# EAGLE board rev_k v57 (EAGLE 9.7.0), part 1 of 2
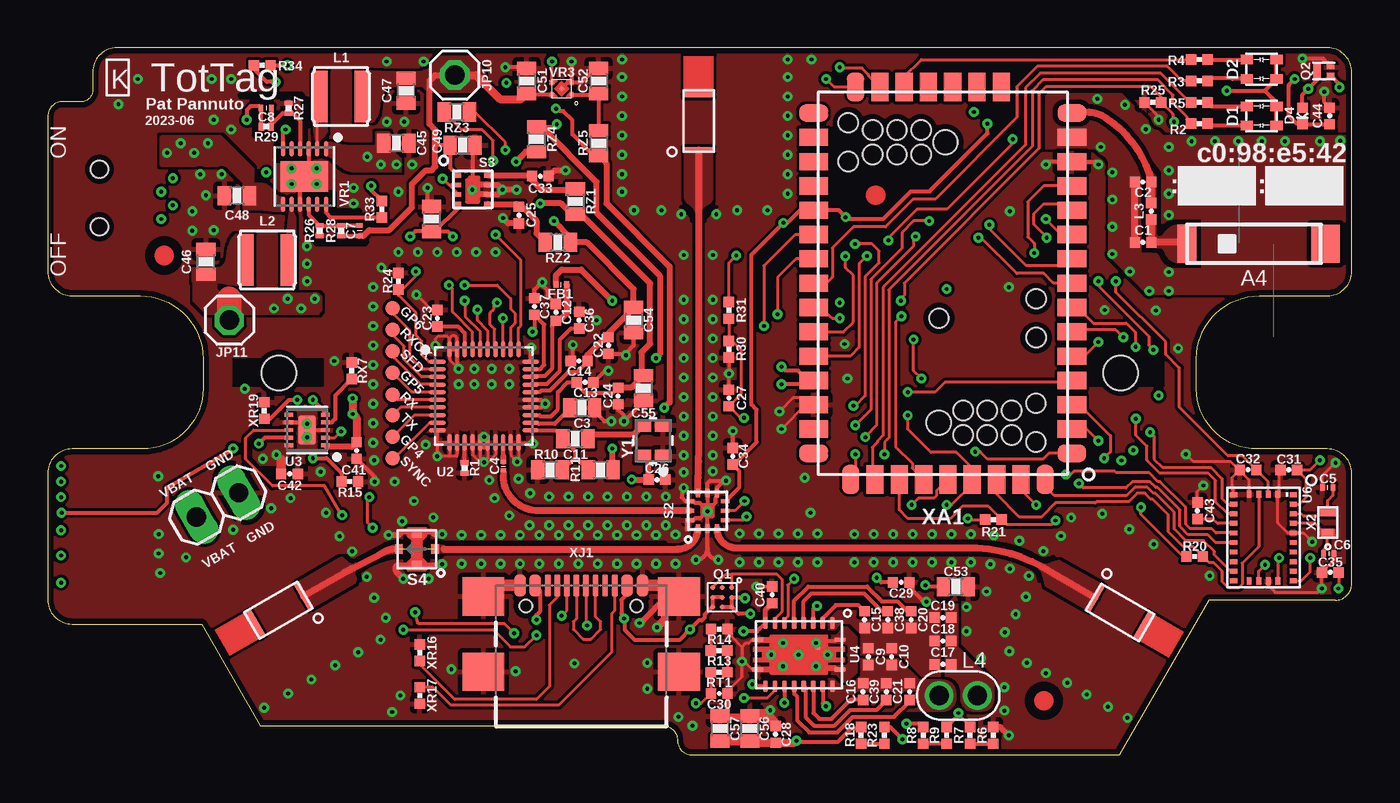
[diagram p0: board, top side]
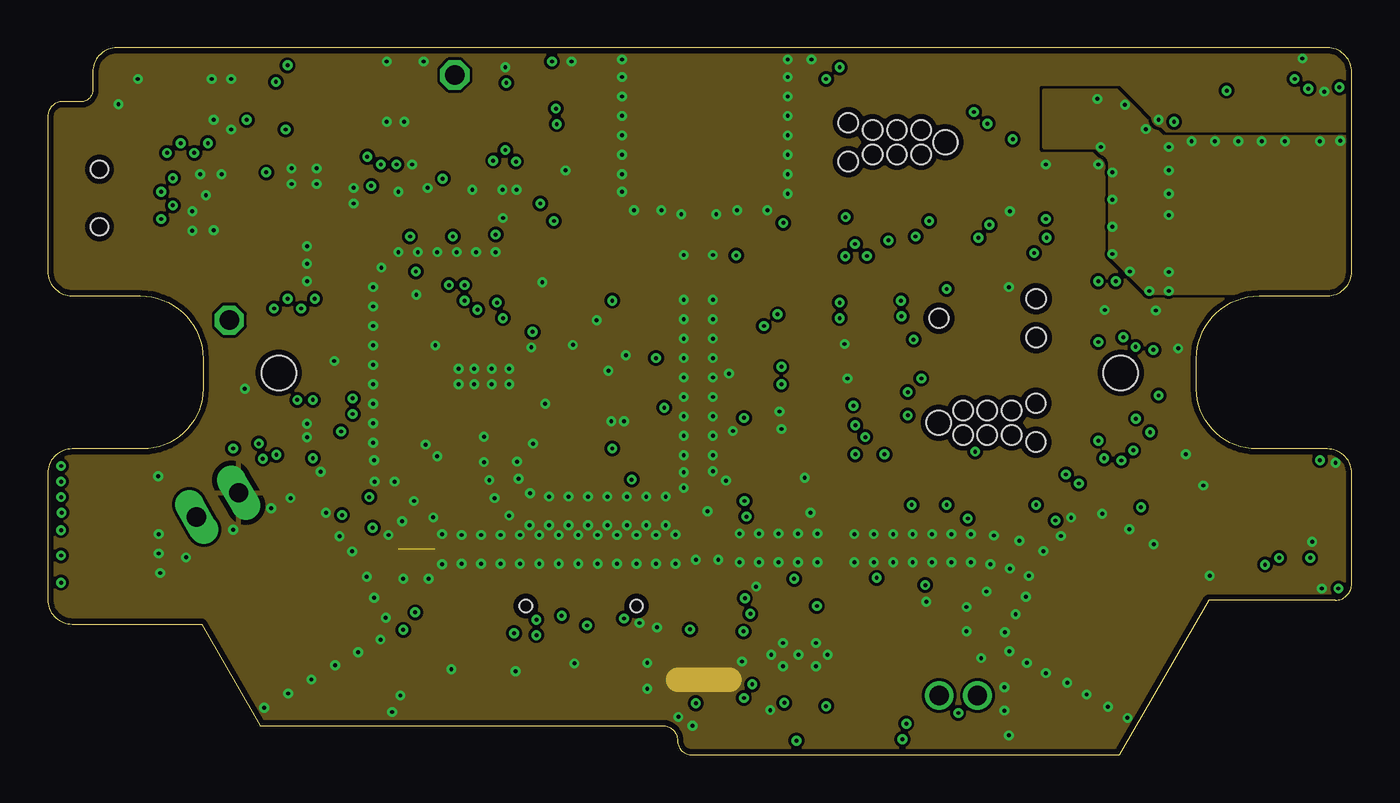
[diagram p1: board, inner layer Route2]
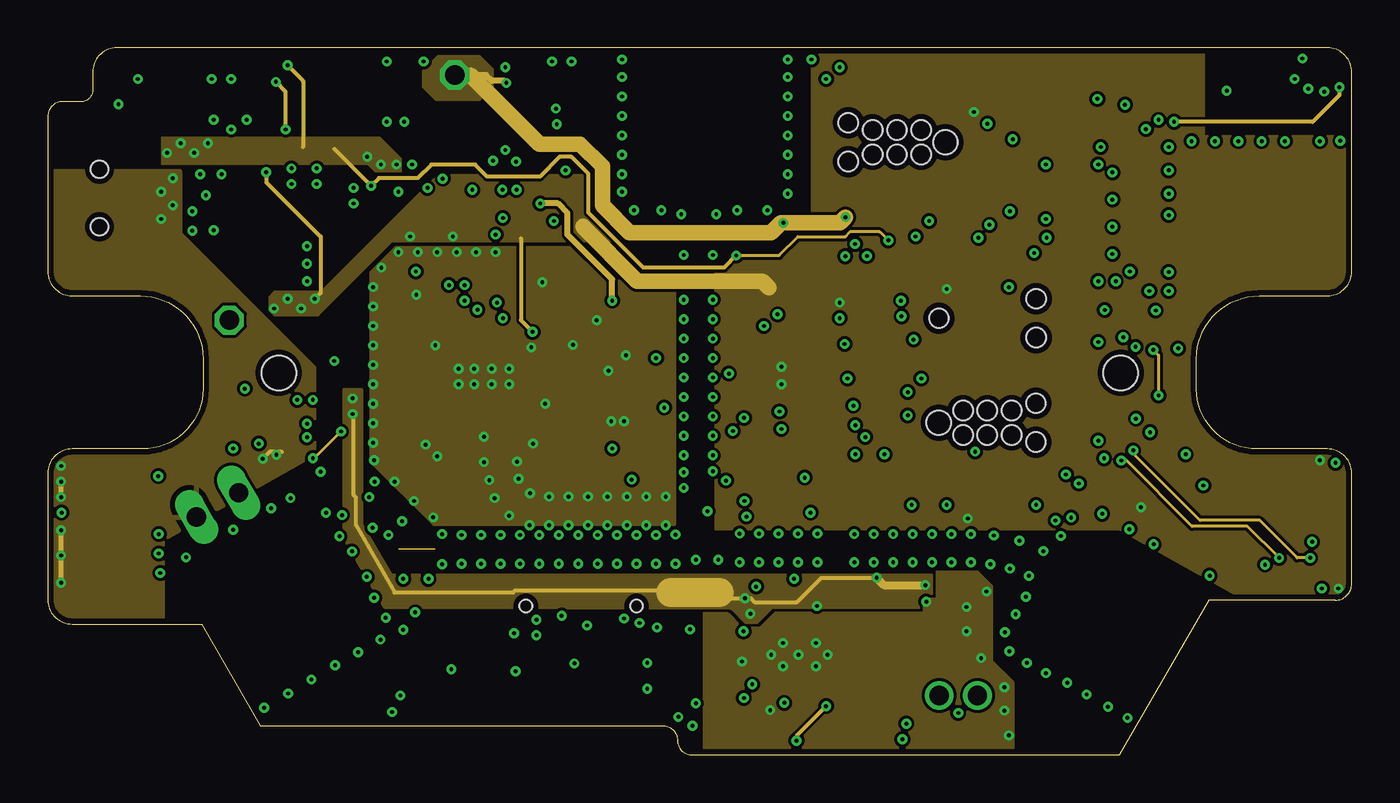
[diagram p2: board, inner layer Route15]
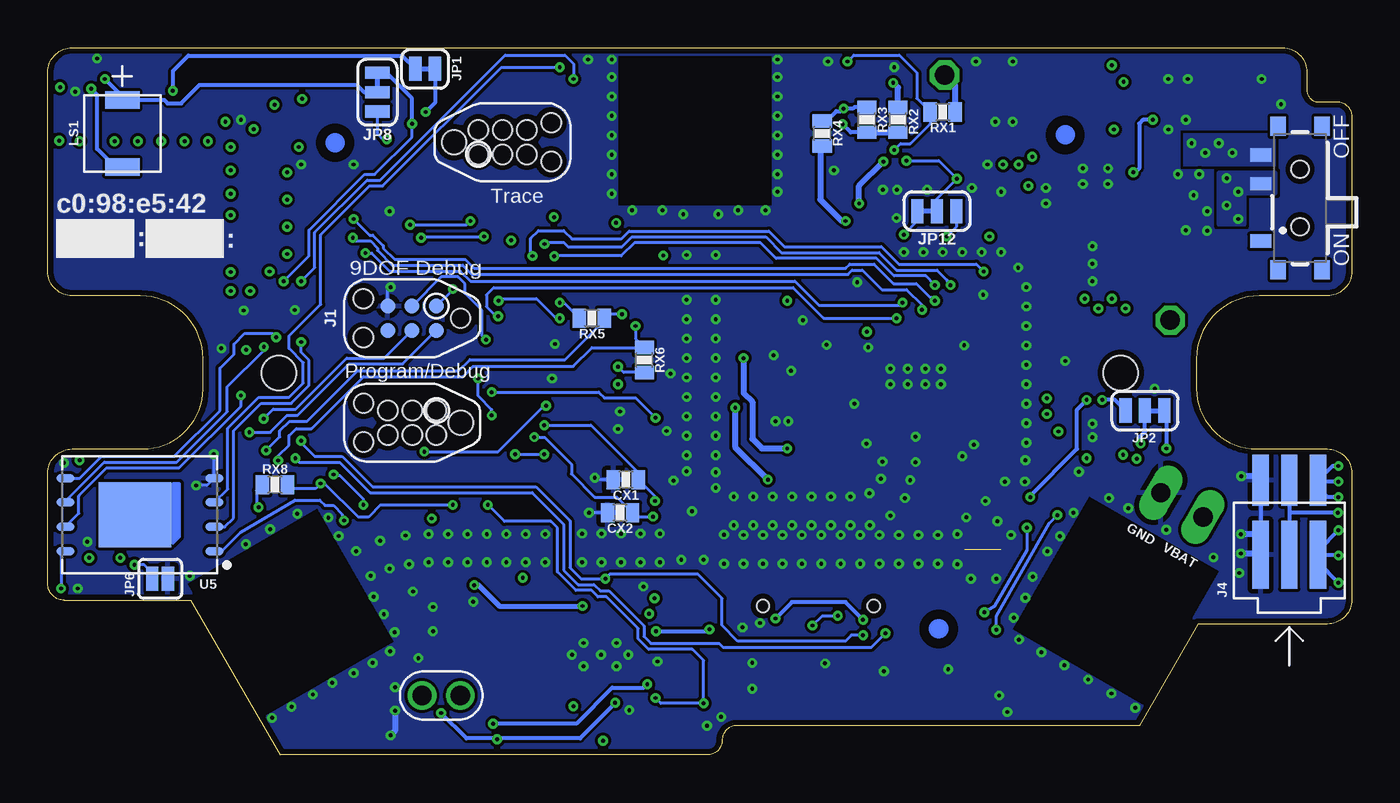
[diagram p3: board, bottom side, seen from below]

Size 68.14 x 36.93 mm. Coordinates in mm from the lower left corner, seen from the top.
Outline: 66.87,36.93 3.61,36.93 arc90 2.34,35.66 2.34,34.7 arc-90 1.76,34.12 0.76,34.12 arc90 0,33.36 0,25.25 arc90 1.27,23.98 4.83,23.98 arc-90 8.11,20.69 8.11,19.14 arc-90 4.95,15.98 1.27,15.98 arc90 0,14.71 0,8.1 arc90 1.27,6.83 8.03,6.83 11.11,1.52 32.14,1.52 arc-90 32.9,0.76 arc90 33.66,0 55.99,0 60.66,8.08 67.29,8.08 arc90 68.14,8.92 68.14,14.71 arc90 66.87,15.98 63.18,15.98 arc-90 60.02,19.14 60.02,20.69 arc-90 63.31,23.98 66.87,23.98 arc90 68.14,25.25 68.14,35.66 arc90 66.87,36.93
Copper layers (1+2*15+16): Top 0.0356mm / dielectric 0.18mm / Route2 0.0356mm / dielectric 1.03mm / Route15 0.0356mm / dielectric 0.18mm / Bottom 0.0356mm
Design rules "quickturn_co_kr_1oz_4lyr *": minimum track width 6mil, minimum drill 8mil, track to track 6mil, track to pad 6mil, pad to pad 6mil, via to via 12mil, smd to smd 6mil, copper to edge 12mil, drill to drill 12mil, minimum pad ring 8mil, minimum via ring 6mil, stop-mask expansion 4mil, vias tented up to drill 10mil, thermal gap 10mil
Net classes: 1 BLE_RF: width 0.356 mm, clearance 0.254 mm; 2 UWB_RF: width 0.356 mm, clearance 0.254 mm
Holes 1.8 mm at 12.07,19.95 56.07,19.95
tKeepout: area 20.8,9.6 to 32.3,11.7; area 34.3,9.6 to 48.8,11.7; area 33.1,12.4 to 35.1,27.8
tRestrict: area 9.7,19.3 to 14.4,20.7; area 53.8,19.3 to 58.3,20.7; area 34.3,27.9 to 35,28.6; area 33.1,27.9 to 33.7,28.6; area 20.1,11 to 32.3,11.2; area 20.1,10.3 to 20.6,10.4; area 15.6,10.1 to 16,10.4; area 16.2,9.1 to 18.4,10.4; area 36.3,11 to 48.4,11.2; area 36.3,10.4 to 48.4,10.5; area 48.5,9 to 51.9,10.5; area 48.5,10.1 to 52.6,11.2; 5 more areas

## Footprints (pad centres in the part's own frame; a part is rotated, then mirrored left to right if it is on the bottom)
ACR0301U = smd 1.57 x 0.3: FEED 3.685,2.89; STRUCT-NC 3.685,5.79
AMCA72-2R470G-S1F-T = smd 2 x 1.5: NC 0,3.75 | smd 2 x 1: S1 0,-3.5
0402_CAP = smd 0.536 x 0.546: 1 -0.433,0; 2 0.433,0
0603_CAP = smd 0.7 x 1: 1 -0.65,0; 2 0.65,0
0201_CAP = smd 0.3 x 0.21: P$1 0,0.22; P$2 0,-0.22
0201_CAP' = smd 0.25 x 0.35: P$1 -0.275,0; P$2 0.275,0
LED-0606 = smd 0.65 x 0.5: A1 0.775,0.5; A2 0.775,-0.5; C1 -0.775,0.5; C2 -0.775,-0.5
0402_DIODE = smd 0.536 x 0.546: ANODE -0.433,0; CATHODE 0.433,0
0201_FB = smd 0.25 x 0.35: P$1 -0.275,0; P$2 0.275,0
TC2030-IDC-NL = smd 0.787 x 0.787: 1 -1.27,-0.635; 2 -1.27,0.635; 3 0,-0.635; 4 0,0.635; 5 1.27,-0.635; 6 1.27,0.635 | hole 1.016: -2.54,0; 2.54,1.016; 2.54,-1.016
MOLEX-PICO-SPOX-3_SIDE = smd 3.55 x 0.85: 1 -1.725,1.5; 2 -1.725,0; 3 -1.725,-1.5 | smd 2.65 x 0.85: 1SUPP 2.175,1.5; 2SUPP 2.175,0; 3SUPP 2.175,-1.5
SMT-JUMPER_2_NC_TRACE_SILK = smd 0.635 x 1.27: 1 -0.508,0; 2 0.508,0
SMT-JUMPER_3_1-NC_TRACE_SILK = smd 0.635 x 1.27: 1 -1.016,0; 2 0,0; 3 1.016,0
SMT-JUMPER_2_NO_SILK = smd 0.635 x 1.27: 1 -0.406,0; 2 0.406,0
1X02 = drill 1.016 long: 1 -1.27,0; 2 1.27,0
1X01 = drill 1.016 octagon: 1 0,0
NRX3015 = smd 0.8 x 2.7: P$1 -1.1,0; P$2 1.1,0
WURTH_COIL_760308103204 = drill 1: P$1 0,1; P$2 0,-1
SMT-0440-T-2-R = smd 0.9 x 1.8: + 1.75,0; - -1.75,0
DSBGA = smd 0.25 x 0.25: A1 -0.5,0.5; A2 0,0.5; A3 0.5,0.5; B1 -0.5,0; B2 0,0; B3 0.5,0; C1 -0.5,-0.5; C2 0,-0.5; C3 0.5,-0.5
XFDFN-3 = smd 0.4 x 0.7: D 0.35,0 | smd 0.4 x 0.25: G -0.35,0.215; S -0.35,-0.215
0201_RES = smd 0.28 x 0.43: 1 -0.255,0; 2 0.255,0
0402_RES = smd 0.536 x 0.546: 1 -0.433,0; 2 0.433,0
0603-RES = smd 0.7 x 1: 1 -0.65,0; 2 0.65,0
450404015514 = smd 0.7 x 1.1: 1 2.25,-2.05; 2 -0.75,-2.05; 3 -2.25,-2.05 | smd 1 x 0.8: Z1 -3.75,1.15; Z2 3.75,1.15; Z3 3.75,-1.15; Z4 -3.75,-1.15 | hole 0.9: -1.5,0; 1.5,0
SKY13373 = smd 0.44 x 0.2: 1 -0.93,0.5; 2 -0.93,0; 3 -0.93,-0.5; 7 0.93,-0.5; 8 0.93,0; 9 0.93,0.5 | smd 0.2 x 0.44: 4 -0.5,-0.93; 5 0,-0.93; 6 0.5,-0.93; 10 0.5,0.93; 11 0,0.93; 12 -0.5,0.93; PAD 0,0
TDFN2X2X0P6-8 = smd 0.4 x 0.24: 1 -0.8,0.75; 2 -0.8,0.25; 3 -0.8,-0.25; 4 -0.8,-0.75; 5 0.8,-0.75; 6 0.8,-0.25; 7 0.8,0.25; 8 0.8,0.75; PAD 0,0
MM8030-2610 = smd 0.4 x 0.5: G1 -0.8,0; G2 0.8,0 | smd 0.5 x 0.4: IN 0,0.95; OUT 0,-0.95
PAD.03X.03 = smd 0.762 x 0.762: P$1 0,0
QFN40P500X500X80-40N = smd 0.862 x 0.224: 1 -2.435,1.8; 2 -2.435,1.4; 3 -2.435,1; 4 -2.435,0.6; 5 -2.435,0.2; 6 -2.435,-0.2; 7 -2.435,-0.6; 8 -2.435,-1; 9 -2.435,-1.4; 10 -2.435,-1.8; 21 2.435,-1.8; 22 2.435,-1.4; 23 2.435,-1; 24 2.435,-0.6; 25 2.435,-0.2; 26 2.435,0.2; 27 2.435,0.6; 28 2.435,1; 29 2.435,1.4; 30 2.435,1.8 | smd 0.224 x 0.862: 11 -1.8,-2.435; 12 -1.4,-2.435; 13 -1,-2.435; 14 -0.6,-2.435; 15 -0.2,-2.435; 16 0.2,-2.435; 17 0.6,-2.435; 18 1,-2.435; 19 1.4,-2.435; 20 1.8,-2.435; 31 1.8,2.435; 32 1.4,2.435; 33 1,2.435; 34 0.6,2.435; 35 0.2,2.435; 36 -0.2,2.435; 37 -0.6,2.435; 38 -1,2.435; 39 -1.4,2.435; 40 -1.8,2.435
DSQ0010A = smd 0.5 x 0.2: 1 -0.95,0.8; 2 -0.95,0.4; 3 -0.95,0; 4 -0.95,-0.4; 5 -0.95,-0.8; 6 0.95,-0.8; 7 0.95,-0.4; 8 0.95,0; 9 0.95,0.4; 10 0.95,0.8 | smd 0.9 x 1.5: PAD 0,0
RHL0020A = smd 0.24 x 0.6: 1 -0.775,2.15; 10 -0.775,-2.15; 11 0.775,-2.15; 20 0.775,2.15 | smd 0.6 x 0.24: 2 -1.65,1.75; 3 -1.65,1.25; 4 -1.65,0.75; 5 -1.65,0.25; 6 -1.65,-0.25; 7 -1.65,-0.75; 8 -1.65,-1.25; 9 -1.65,-1.75; 12 1.65,-1.75; 13 1.65,-1.25; 14 1.65,-0.75; 15 1.65,-0.25; 16 1.65,0.25; 17 1.65,0.75; 18 1.65,1.25; 19 1.65,1.75; PAD -0.55,1
WSON127P800X600X80-9T430X340N = smd 0.94 x 0.445: 1 -3.896,1.905; 2 -3.896,0.635; 3 -3.896,-0.635; 4 -3.896,-1.905; 5 3.896,-1.905; 6 3.896,-0.635; 7 3.896,0.635; 8 3.896,1.905 | smd 3.8 x 3.4: PAD 0.25,0
LGA28R0P510X4_5P2X3P8X1 = smd 0.25 x 0.375: 1 -2.25,1.562; 6 -2.25,-1.562; 7 -1.75,-1.562; 8 -1.25,-1.562; 9 -0.75,-1.562; 10 -0.25,-1.562; 11 0.25,-1.562; 12 0.75,-1.562; 13 1.25,-1.562; 14 1.75,-1.562; 15 2.25,-1.562; 20 2.25,1.562; 21 1.75,1.562; 22 1.25,1.562; 23 0.75,1.562; 24 0.25,1.562; 25 -0.25,1.562; 26 -0.75,1.562; 27 -1.25,1.562; 28 -1.75,1.562 | smd 0.375 x 0.25: 2 -2.263,0.75; 3 -2.263,0.25; 4 -2.263,-0.25; 5 -2.263,-0.75; 16 2.263,-0.75; 17 2.263,-0.25; 18 2.263,0.25; 19 2.263,0.75
SON45P300X300X80-13T160X250N = smd 0.813 x 0.224: 1 -1.445,1.125; 2 -1.445,0.675; 3 -1.445,0.225; 4 -1.445,-0.225; 5 -1.445,-0.675; 6 -1.445,-1.125; 7 1.445,-1.125; 8 1.445,-0.675; 9 1.445,-0.225; 10 1.445,0.225; 11 1.445,0.675; 12 1.445,1.125 | smd 1.6 x 2.5: 13 0,0
4-XDFN-EP = smd 0.21 x 0.21: 1 -0.505,0.325; 2 -0.505,-0.325; 3 0.505,-0.325; 4 0.505,0.325 | smd 0.2 x 0.2 rotated 45: PAD 0,0
TXC-9HT12 = smd 0.4 x 0.6: 1 -0.53,0 | smd 0.4 x 0.86: 2 0.53,0
APOLLO4_BLUEPLUS_MODULE = smd 1.5 x 0.9: P1 -6.75,8.89; P2 -6.75,7.62; P3 -6.75,6.35; P4 -6.75,5.08; P5 -6.75,3.81; P6 -6.75,2.54; P7 -6.75,1.27; P8 -6.75,0; P9 -6.75,-1.27; P10 -6.75,-2.54; P11 -6.75,-3.81; P12 -6.75,-5.08; P13 -6.75,-6.35; P14 -6.75,-7.62; P15 -6.75,-8.89; P25 6.75,-8.89; P26 6.75,-7.62; P27 6.75,-6.35; P28 6.75,-5.08; P29 6.75,-3.81; P30 6.75,-2.54; P31 6.75,-1.27; P32 6.75,0; P33 6.75,1.27; P34 6.75,2.54; P35 6.75,3.81; P36 6.75,5.08; P37 6.75,6.35; P38 6.75,7.62; P39 6.75,8.89 | smd 0.9 x 1.5: P18 -3.06,-10.25; P19 -1.79,-10.25; P20 -0.52,-10.25; P21 0.75,-10.25; P22 2.02,-10.25; P23 3.29,-10.25; P24 4.56,-10.25; P40 4.81,10.25; P41 3.54,10.25; P42 2.27,10.25; P43 1,10.25; P44 -0.27,10.25; P45 -1.54,10.25; P46 -2.81,10.25; P47 -4.08,10.25; P48 -5.35,10.25 | hole 1.27: -0.143,-7.366; 0.213,7.29 | hole 1.016: 4.937,-6.35; 4.937,-8.382; 1.127,-8.001; 1.127,-6.731; 2.397,-8.001; 2.397,-6.731; 3.667,-6.731; 3.667,-8.001; -4.867,6.274; -4.867,8.306; -1.057,7.925; -1.057,6.655; -2.327,7.925; -2.327,6.655; -3.597,6.655; -3.597,7.925
GCT_USB4110-GF-A = smd 0.6 x 1.15: A1/B12 -3.2,1.075; A4/B9 -2.4,1.075; B1/A12 3.2,1.075; B4/A9 2.4,1.075 | smd 0.3 x 1.15: A5 -1.25,1.075; A6 -0.25,1.075; A7 0.25,1.075; A8 1.25,1.075; B5 1.75,1.075; B6 0.75,1.075; B7 -0.75,1.075; B8 -1.75,1.075 | smd 2.18 x 2: S1 -5.11,0.5; S2 5.11,0.5; S3 -5.11,-3.43; S4 5.11,-3.43 | hole 0.65: -2.89,0; 2.89,0
OSCCC200X160X80 = smd 0.65 x 0.85: 1 -0.8,-0.525; 2 0.8,-0.525; 3 0.8,0.525; 4 -0.8,0.525

## Placement (x,y rotation side)
A1  ACR0301U  [ACR0301U]  30.32,28.71 0 top
A2  ACR0301U  [ACR0301U]  54.07,12.84 240 top
A3  ACR0301U  [ACR0301U]  17.71,6.55 120 top
A4  AMCA72-2R47G-S1F-T  [AMCA72-2R470G-S1F-T]  63.02,26.7 270 top
C1  0.5pF  [0402_CAP]  57.23,26.77 180 top
C2  0.8pF  [0402_CAP]  57.23,29.92 180 top
C3  1pF  [0603_CAP]  27.92,18.14 0 top
C4  2pF  [0201_CAP]  23.81,15.09 0 top
C5  4pF  [0201_CAP']  66.88,13.97 0 top
C6  4pF  [0201_CAP']  66.94,10.52 180 top
C7  22pF  [0201_CAP']  16.29,27.38 90 top
C8  22pF  [0201_CAP']  11.41,33.78 180 top
C9  470pF  [0402_CAP]  42.88,5.13 270 top
C10  470pF  [0402_CAP]  44.1,5.13 270 top
C11  2200pF  [0603_CAP]  27.57,16.51 0 top
C12  4.7nF  [0402_CAP]  26.55,23.11 90 top
C13  4.7nF  [0402_CAP]  28.07,19.46 0 top
C14  4.7nF  [0402_CAP]  27.77,20.57 180 top
C15  10nF  [0402_CAP]  42.68,7.06 270 top
C16  10nF  [0402_CAP]  42.6,3.3 90 top
C17  22nF  [0402_CAP]  46.77,4.72 0 top
C18  22nF  [0402_CAP]  46.77,5.94 0 top
C19  22nF  [0402_CAP]  46.77,7.16 0 top
C20  22nF  [0402_CAP]  45.12,7.06 270 top
C21  22nF  [0402_CAP]  45.04,3.3 90 top
C22  0.1uF  [0402_CAP]  29.29,21.39 270 top
C23  0.1uF  [0402_CAP]  20.35,22.81 90 top
C24  0.1uF  [0402_CAP]  29.8,18.75 270 top
C25  0.1uF  [0402_CAP]  24.62,28.19 270 top
C26  0.1uF  [0402_CAP]  31.83,14.38 0 top
C27  0.1uF  [0402_CAP]  35.59,18.64 90 top
C28  0.1uF  [0402_CAP]  38.03,1.07 90 top
C29  0.1uF  [0402_CAP]  44.59,9.01 0 top
C30  0.1uF  [0402_CAP]  35.08,3.2 0 top
C31  0.1uF  [0402_CAP]  64.85,14.88 180 top
C32  0.1uF  [0402_CAP]  62.72,14.88 180 top
C33  0.1uF  [0402_CAP]  25.74,30.23 0 top
C34  0.1uF  [0402_CAP]  35.8,15.6 90 top
C35  0.1uF  [0402_CAP]  67.02,9.53 180 top
C36  0.22uF  [0402_CAP]  27.77,22.71 90 top
C37  0.22uF  [0402_CAP]  25.43,23.42 90 top
C38  0.47uF  [0402_CAP]  43.9,7.06 270 top
C39  0.47uF  [0402_CAP]  43.82,3.3 90 top
C40  1uF  [0402_CAP]  37.85,8.36 270 top
C41  1uF  [0402_CAP]  16.14,15.9 270 top
C42  1uF  [0402_CAP]  12.63,14.68 0 top
C43  1uF  [0402_CAP]  60.08,12.75 90 top
C44  1uF  [0402_CAP]  66.99,33.38 90 top
C45  4.7uF  [0603_CAP]  18.22,31.95 180 top
C46  4.7uF  [0603_CAP]  8.26,25.76 90 top
C47  4.7uF  [0603_CAP]  18.73,34.7 90 top
C48  4.7uF  [0603_CAP]  9.89,29.21 180 top
C49  4.7uF  [0603_CAP]  21.67,31.85 0 top
C50  4.7uF  [0603_CAP]  20.05,27.99 270 top
C51  4.7uF  [0603_CAP]  25.03,35.2 270 top
C52  4.7uF  [0603_CAP]  28.78,35.2 270 top
C53  10uF  [0603_CAP]  47.45,8.79 0 top
C54  10uF  [0603_CAP]  30.61,22.71 270 top
C55  10uF  [0603_CAP]  31.12,19.15 270 top
C56  10uF  [0603_CAP]  36.68,1.37 90 top
C57  10uF  [0603_CAP]  35.13,1.37 90 top
CX1  DNP  [0603_CAP]  37.93,14.38 180 bottom
CX2  DNP  [0603_CAP]  38.23,12.65 180 bottom
D1  BICOLOR-SMD  [LED-0606]  63.43,33.38 0 top
D2  BICOLOR-SMD  [LED-0606]  63.43,35.81 0 top
D4  DIODE0402  [0402_DIODE]  65.56,33.38 270 top
FB1  BLM03PG330SN1D  [0201_FB]  26.83,24.56 0 top
FD1  FIDUCIAL  [FIDUCIAL_1MM-CU_2MM-MASK]  6.08,26.09 0 top
FD2  FIDUCIAL  [FIDUCIAL_1MM-CU_2MM-MASK]  52.05,2.82 0 top
FD3  FIDUCIAL  [FIDUCIAL_1MM-CU_2MM-MASK]  43.26,29.24 0 top
FD4  FIDUCIAL  [FIDUCIAL_1MM-CU_2MM-MASK]  14.97,32.39 0 bottom
FD5  FIDUCIAL  [FIDUCIAL_1MM-CU_2MM-MASK]  53.12,31.98 0 bottom
FD6  FIDUCIAL  [FIDUCIAL_1MM-CU_2MM-MASK]  21.58,6.58 0 bottom
J1  TC2030-JLINK-NL  [TC2030-IDC-NL]  49.1,22.81 180 bottom
J4  MOLEX-PICO-SPOX-3SIDE  [MOLEX-PICO-SPOX-3_SIDE]  3.26,12.17 90 bottom
JP1  JUMPER-SMT_2_NC_TRACE_SILK  [SMT-JUMPER_2_NC_TRACE_SILK]  48.42,35.84 0 bottom
JP2  JUMPER-SMT_3_1-NC_TRACE_SILK  [SMT-JUMPER_3_1-NC_TRACE_SILK]  10.8,17.98 0 bottom
JP6  JUMPER-SMT_2_NO_SILK  [SMT-JUMPER_2_NO_SILK]  62.27,9.19 180 bottom
JP8  JUMPER-SMT_3_1-NC_TRACE_SILK  [SMT-JUMPER_3_1-NC_TRACE_SILK]  50.91,34.62 90 bottom
JP9  [1X02]  8.87,13.06 30 top
JP10  [1X01]  21.27,35.51 180 top
JP11  [1X01]  9.48,22.71 0 top
JP12  JUMPER-SMT_3_1-NC_TRACE_SILK  [SMT-JUMPER_3_1-NC_TRACE_SILK]  21.67,28.4 180 bottom
L1  10uH  [NRX3015]  15.32,34.39 0 top
L2  10uH  [NRX3015]  11.46,25.86 0 top
L3  4.7nH  [0402_CAP]  57.66,28.4 90 top
L4  WURTH_COIL_760308103204  [WURTH_COIL_760308103204]  47.58,3.1 270 top
LS1  PUI_SMT-0440-T-2-R  [SMT-0440-T-2-R]  64.24,32.46 90 bottom
Q1  CSD75207W15  [DSBGA]  35.24,8.23 270 top
Q2  MOSFET-NCHANNELXFDN-3  [XFDFN-3]  66.68,35.71 180 top
R1  49.9-1%  [0201_RES]  21.77,14.99 270 top
R2  5.1  [0402_RES]  60.18,32.97 180 top
R3  5.1  [0402_RES]  60.18,35.2 180 top
R4  15  [0402_RES]  60.18,36.32 180 top
R5  15  [0402_RES]  60.18,34.09 180 top
R6  97.6  [0402_RES]  49.41,1.02 90 top
R7  97.6  [0402_RES]  48.19,1.02 270 top
R8  162  [0402_RES]  45.75,1.02 270 top
R9  162  [0402_RES]  46.97,1.02 90 top
R10  330  [0603-RES]  26.24,14.88 0 top
R11  698  [0603-RES]  28.89,14.88 0 top
R13  1k  [0402_RES]  35.08,5.44 0 top
R14  1k  [0402_RES]  35.08,6.56 180 top
R15  2.2k  [0402_RES]  15.78,14.27 180 top
R18  10k  [0402_RES]  42.5,1.02 270 top
R20  10k  [0402_RES]  59.93,10.36 180 top
R21  10k  [0402_RES]  49.42,12.29 180 top
R23  10k  [0402_RES]  43.72,1.02 90 top
R24  100k  [0402_RES]  18.32,24.74 270 top
R25  100k  [0402_RES]  57.74,34.09 180 top
R26  261k  [0201_RES]  14.21,27.38 90 top
R27  402k  [0201_RES]  12.58,33.78 270 top
R28  845k  [0201_RES]  15.32,27.38 270 top
R29  845k  [0201_RES]  11.41,32.82 0 top
R30  1.87M  [0402_RES]  35.59,21.18 90 top
R31  5.1M  [0402_RES]  35.59,23.22 90 top
R33  5.1M  [0402_RES]  17.46,28.5 270 top
R34  5.1M  [0402_RES]  11.21,36.02 180 top
RT1  10k@25C  [0402_RES]  35.08,4.31 180 top
RX1  DNP  [0603-RES]  21.37,33.58 180 bottom
RX2  DNP  [0603-RES]  23.7,33.17 90 bottom
RX3  DNP  [0603-RES]  25.33,33.17 90 bottom
RX4  DNP  [0603-RES]  27.67,32.46 90 bottom
RX5  DNP  [0603-RES]  39.71,22.81 0 bottom
RX6  DNP  [0603-RES]  36.96,20.62 90 bottom
RX7  DNP  [0402_RES]  15.88,20.07 270 top
RX8  DNP  [0603-RES]  56.27,14.11 180 bottom
RZ1  0  [0603-RES]  27.57,28.91 270 top
RZ2  0  [0603-RES]  26.65,26.77 0 top
RZ3  0  [0603-RES]  21.37,33.58 0 top
RZ4  0  [0603-RES]  25.53,32.16 270 top
RZ5  0  [0603-RES]  28.78,31.95 270 top
S1  [450404015514]  2.7,29.08 270 bottom
S2  SKY13373  [SKY13373]  34.47,12.75 90 top
S3  SIP3241XSIP32414  [TDFN2X2X0P6-8]  22.21,29.52 0 top
S4  MM8030-2610  [MM8030-2610]  19.29,10.74 270 top
TP0  TEST-POINT  [PAD.03X.03]  18.02,22.2 0 top
TP1  TEST-POINT  [PAD.03X.03]  18.02,21.08 0 top
TP2  TEST-POINT  [PAD.03X.03]  18.02,18.82 0 top
TP3  TEST-POINT  [PAD.03X.03]  18.02,17.73 0 top
TP4  TEST-POINT  [PAD.03X.03]  18.02,16.61 0 top
TP5  TEST-POINT  [PAD.03X.03]  18.02,19.96 0 top
TP6  TEST-POINT  [PAD.03X.03]  18.02,23.32 0 top
TP7  TEST-POINT  [PAD.03X.03]  18.02,15.49 0 top
U2  DW3210  [QFN40P500X500X80-40N]  22.79,18.75 0 top
U3  BQ24040  [DSQ0010A]  13.54,16.97 180 top
U4  BQ51013B  [RHL0020A]  39.25,5.23 270 top
U5  W25N01GWZEIG  [WSON127P800X600X80-9T430X340N]  63.33,12.55 180 bottom
U6  BNO055  [LGA28R0P510X4_5P2X3P8X1]  63.53,11.34 270 top
VR1  RT8020RT8020GQW  [SON45P300X300X80-13T160X250N]  13.41,30.21 270 top
VR3  TPS7A0218PDQNR  [4-XDFN-EP]  26.85,34.8 180 top
X2  TXC-9HT12  [TXC-9HT12]  66.88,12.14 90 top
XA1  APOLLO4_BLUEPLUS_MODULE  [APOLLO4_BLUEPLUS_MODULE]  46.77,24.64 180 top
XJ1  USB4110-GF-A  [GCT_USB4110-GF-A]  27.87,7.77 0 top
XR16  5.1k  [0402_RES]  19.44,5.33 90 top
XR17  5.1k  [0402_RES]  19.44,3.1 270 top
XR19  10k  [0402_RES]  11.31,17.98 270 top
Y1  38.4 MHz  [OSCCC200X160X80]  31.63,16.41 90 top

## Library data of the parts
A1-A3 = antennas; MANUFACTURER: Abracon; MPN: ACR0301U
A4 = antennas; DESCRIPTION: RF ANT 2.4GHZ CHIP SOLDER SMD; DIGIKEY: 535-14108-1-ND; MPN: AMCA72-2R470G-S1F-T4
C1 = passives; MPN: GJM1555C1HR50WB01D
C2 = passives; MPN: GJM1555C1HR80WB01D
C3 = passives; MANUFACTURER: Kemet; MPN: C0603C109C5GACAUTO
C4 = passives; MPN: CBR02C209A5GAC
C5 C6 = passives; MANUFACTURER: Murata; MPN: GRM0335C1H4R0BA01D
C7 C8 = passives; MPN: GRM0335C1H220FA01D
C9 C10 = passives; DESCRIPTION: CAP CER 470PF 50V C0G/NP0 0402; DIGIKEY: 490-6242-1-ND; MANUFACTURER: Murata; MPN: GRM1555C1H471JA01J
C11 = passives; FEATURE: Low ESL; MANUFACTURER: Kemet; MPN: C0603C222F3GEC7867; TEMPCO: NP0
C12-C14 = passives; MPN: C0402C472K3RAC7867
C15 C16 = passives; DIGIKEY: 490-6351-2-ND; MPN: GRM155R71H103KA88J
C17-C19 = passives; DIGIKEY: 490-10699-2-ND; MPN: GRM155R71E223JA61D
C20 C21 = passives; DIGIKEY: 311-3823-1-ND; MPN: CC0402ZRY5V8BB223
C22-C26 C31-C35 = passives; MPN: CL05A104KP5NNNC
C27-C30 = passives; DIGIKEY: 490-6328-1-ND; MPN: GRM155R71C104KA88J
C36 C37 = passives; MPN: CL05A224KP5NNNC
C38 C39 = passives; DIGIKEY: 490-12270-1-ND; MPN: GRT155R61E474ME01D
C40-C44 = passives; MPN: GRM155R70J105KA12J
C45-C52 = passives; APPLICATION: SMPS Filter; MPN: C1608X7S1A475K080AC
C53-C57 = passives; DIGIKEY: 1253-CM105X5R106M25ATCT-ND; MPN: CM105X5R106M25AT
CX1 CX2 R13 R14 RX1-RX8 = passives
D1 = leds; MPN: MCL0606FRD1GR1T
D2 = leds; MPN: MCL0606FYW1RD1T
D4 = passives; DIGIKEY: 641-2087-1-ND; MPN: CDSQR400B-HF
FB1 = passives; MANUFACTURER: Murata; MPN: BLM03PG330SN1D
FD1-FD6 XA1 = Quorvo
J1 = connector
J4 = connector; DIGIKEY: WM7647CT-ND; MFN: 874380343
JP1 JP2 JP6 JP8 JP12 = SparkFun-Jumpers
JP9-JP11 = pinhead
L1 L2 = passives; MANUFACTURER: TAIYO YUDEN; MPN: NR3015T100M
L3 = passives; MPN: LQW15AN4N7G8ZD
L4 = ac; DIGIKEY: 732-5258-ND; MANUFACTURER: Würth Elektronik; MPN: 760308103204
LS1 = audio; DIGIKEY: 668-SMT-0440-T-2-RTR-ND; MPN: SMT-0440-T-2-R
Q1 = fets; DIGIKEY: 296-40008-1-ND; MANUFACTURER: TEXAS INSTRUMENTS; MPN: CSD75207W15
Q2 = fets; DIGIKEY: DMN2400UFB4-7DICT-ND
R1 = passives; MPN: ERJ-1GNF49R9C
R2 R3 = passives; MPN: RC0402JR-075R1L
R4 R5 = passives; MPN: RC0402JR-0715RL
R6 R7 = passives; DIGIKEY: RMCF0402FT97R6CT-ND; MPN: RMCF0402FT97R6
R8 R9 = passives; DIGIKEY: RMCF0402FT162RCT-ND; MPN: RMCF0402FT162R
R10 = passives; MANUFACTURER: Yageo; MPN: RC0805FR-13330RL; TOLERANCE: +/- 1%
R11 = passives; MANUFACTURER: Yageo; MPN: RC0805FR-07698RL; TOLERANCE: +/- 1%
R15 = passives; DIGIKEY: RMCF0402JT2K20CT-ND; MPN: RMCF0402JT2K20
R18 R20 R21 R23 XR19 = passives; DIGIKEY: 311-10KJRCT-ND; MPN: RC0402JR-0710KL
R24 R25 = passives; MPN: RT0402BRE07100KL
R26 = passives; MPN: ERJ-1GNF2613C
R27 = passives; MPN: ERJ-1GNF4023C
R28 R29 = passives; MPN: ERJ-1GNF8453C
R30 = passives; MPN: RMCF0402FT1M87; TOLERANCE: 1%
R31 = passives; DIGIKEY: RMCF0402FT5M10CT-ND; MPN: RMCF0402FT5M10; TOLERANCE: 1%
R33 R34 = passives; DIGIKEY: RMCF0402FT5M10CT-ND; MPN: RMCF0402FT5M10
RT1 = passives; DIGIKEY: 490-18149-1-ND; MPN: NCU15XH103F60RC
RZ1-RZ5 = passives; MPN: RMCF0603ZT0R00; SUBSTITUTE: ANY
S1 = Wurth_Switch_WS-SLSU; DATASHEET-URL: https://www.we-online.com/catalog/datasheet/450404015514.pdf; DIGIKEY: 732-13665-1-ND; IR: 300mA; PACKAGING: Tape and Reel; PART-NUMBER: 450404015514; QTY: 150; VR: 5V(DC)
S2 = switches; MANUFACTURER: Skyworks; MPN: SKY13373-460LF
S3 = switches; MANUFACTURER: Vishay; MPN: SIP32414DNP-T1-GE4
S4 = switches; DURABILITY: 100 Cycles; FREQ-MAX: 11 GHz; MANUFACTURER: Murata; MPN: MM8030-2610
TP0 TP1-TP7 = headers
U2 = Quorvo; MANUFACTURER: Qorvo; MPN: DW3210
U3 = chips; DIGIKEY: 296-37142-1-ND; MPN: BQ24040DSQR
U4 = chips; DIGIKEY: 296-38885-1-ND; MPN: BQ51013BRHLR
U5 = Quorvo; MANUFACTURER: Winbond; MPN: W25N01GWZEIG
U6 = Quorvo; MANUFACTURER: Bosch Scientific; MPN: BNO055
VR1 = regulators; MANUFACTURER: RichTek; MPN: RT8020GQW
VR3 = regulators; MPN: TPS7A0218PDQNR
X2 = crystals; C-LOAD: 7pF; FREQUENCY: 32.768 kHz; MANUFACTURER: TXC Corp; MPN: 9HT12-32.768KDZY-T
XJ1 = connector; DESCRIPTION: USB-C (USB TYPE-C) USB 2.0 Receptacle Connector 24 (16+8 Dummy) Position Surface Mount, Right Angle; Through Hole; DIGIKEY: 2073-USB4110-GF-A-1-ND; MF: GCT; MPN: USB4110-GF-A; PACKAGE: None
XR16 XR17 = passives; DIGIKEY: RMCF0402FT5K10CT-ND; MPN: RMCF0402FT5K10
Y1 = crystals; MANUFACTURER: Jauch Quartz; MPN: O 38,40-JT21G-E-M-1,8-LF

## Nets
9DOF_!BOOT_LOAD_PIN: R20.1 U6.4 XA1.P46
9DOF_!RESET: J1.3 RX8.1 U6.11 XA1.P45
9DOF_BL_IND: U6.10 XA1.P47
9DOF_CAP: C43.1 U6.9
9DOF_INT: U6.14 XA1.P48
9DOF_SCL-COM1: RX6.2 U6.19 XA1.P30
9DOF_SDA-COM0: RX5.2 U6.20 XA1.P31
9DOF_SWCLK: J1.4 U6.8
9DOF_SWDIO: J1.2 U6.7
9DOF_XI: C5.P$2 U6.27 X2.2
9DOF_XO: C6.P$2 U6.26 X2.1
!AD_EN: Q1.A1 Q1.C1 U4.8
!CHG: U3.8 U4.7 XA1.P2
!DW_RST: U2.33 XA1.P43
!DW_SPI_CS: U2.37 XA1.P1
!PG: U3.5 XA1.P3
+1V8: C8.P$2 C31.1 C35.1 C37.1 C46.1 C50.2 J1.1 JP1.2 JP11.1 JP12.1 L2.P$1 R20.2 R21.2 R29.1 RX5.1 RX6.1 RX8.2 S3.4 U2.29 U5.8 U6.28 XA1.P36
+2V5: C7.P$1 C32.1 C34.1 C47.2 C49.1 C51.2 JP8.3 JP10.1 L1.P$2 R28.2 RX1.1 RX2.2 S2.6 S3.1 U6.3 VR3.4 XA1.P29
AGND [BLE_RF]: C1.2 C2.2 XA1.P14
AP4_LED1_GREEN: R2.2 XA1.P40
AP4_LED1_RED: R5.2 XA1.P41
AP4_LED2_BLUE_COMM: D1.C1 R5.1
AP4_LED2_RED: R4.2 XA1.P22
AP4_LED2_YELLOW: R3.2 XA1.P32
AP4_LED_BLUE_COMM: D2.C2 R3.1
AP4_LED_GREEN_COMM: D2.C1 R4.1
AP4_LED_RED_COMM: D1.C2 R2.1
AP4_RFIOP [BLE_RF]: C2.1 L3.2 XA1.P15
BATIN: C27.1 R30.2 R31.1 XA1.P4
BATT_THERM: J4.2 J4.2SUPP JP2.3
BATT_TS: JP2.2 U3.9
BLE_ANT_FEED [BLE_RF]: A4.S1 C1.1 L3.1
BQ_AC1: C9.1 C10.1 C15.2 C17.1 C18.1 C19.1 C20.2 C38.2 U4.2
BQ_AC2: C9.2 C10.2 C16.2 C21.2 C39.2 L4.P$2 U4.19
BQ_BOOT1: C15.1 U4.3
BQ_BOOT2: C16.1 U4.17
BQ_CLAMP1: C38.1 U4.5
BQ_CLAMP2: C39.1 U4.16
BQ_COMM1: C20.1 U4.6
BQ_COMM2: C21.1 U4.15
BQ_FOD: R7.1 R9.2 R23.2 U4.14
BQ_ILM: R8.1 U4.12
BQ_ISET: R15.2 U3.2
BQ_RECT: C28.1 C56.1 C57.1 R18.1 U4.18
BUZZER_GATE: Q2.G R25.1 XA1.P33
BUZZER_SUPPLY: C44.1 D4.CATHODE JP8.2 LS1.+
COIL_AC1: C17.2 C18.2 C19.2 L4.P$1
D+: XJ1.A6 XJ1.B6
D-: XJ1.A7 XJ1.B7
DW_EXTON: JP12.2 RZ3.1 S3.2 S3.3
DW_EXTON_RAW: JP12.3 U2.31
DW_GPIO4: TP4.P$1 U2.8
DW_GPIO5: TP5.P$1 U2.5
DW_GPIO6: TP6.P$1 U2.2
DW_IRQ: R24.2 U2.1 XA1.P35
DW_RF1 [UWB_RF]: C4.P$1 U2.18
DW_RF2: R1.1 U2.13
DW_RXLED: TP2.P$1 U2.6
DW_RXOKLED: TP0.P$1 U2.3
DW_SFDLED: TP1.P$1 U2.4
DW_SPI_CIPO: U2.36 XA1.P10
DW_SPI_CLK: U2.34 XA1.P12
DW_SPI_COPI: U2.35 XA1.P11
DW_SYNC: TP7.P$1 U2.9
DW_TXLED: TP3.P$1 U2.7
DW_VDD2_PWROUT: C33.1 RZ1.1 S3.8
DW_VDD2_SUP: C13.1 C24.1 C55.1 FB1.P$1 RZ1.2 RZ4.2 U2.23
DW_VDD2A: C12.1 FB1.P$2 U2.28
DW_VDD3_PWROUT: C25.1 RZ2.1 S3.5
DW_VDD3_SUP: C14.1 C22.1 C54.1 RX4.1 RZ2.2 U2.26
DW_VIO_D: C23.1 U2.38
DW_VTX_D: C36.1 U2.27
DW_WAKEUP: U2.32 XA1.P34
DW_XTO: C3.1 U2.22
FLASH_!CS: R21.1 U5.1 XA1.P42
FLASH_!HOLD!-IO3: U5.7 XA1.P24
FLASH_!WP!-IO2: U5.3 XA1.P23
FLASH_CLK: U5.6 XA1.P7
FLASH_PDI-IO0: U5.5 XA1.P6
FLASH_PDO-IO1: U5.2 XA1.P5
GND: C3.2 C5.P$1 C6.P$1 C12.2 C13.2 C14.2 C22.2 C23.2 C24.2 C25.2 C26.2 C27.2 C28.2 C29.2 C30.2 C31.2 C32.2 C33.2 C34.2 C35.2 C36.2 C37.2 C40.1 C41.2 C42.2 C43.2 C44.2 C45.1 C46.2 C47.1 C48.2 C49.2 C50.1 C51.1 C52.1 C53.2 C54.2 C55.2 C56.2 C57.2 CX1.2 CX2.2 J1.5 J4.1 J4.1SUPP JP6.1 JP9.2 Q2.S R1.2 R6.2 R10.1 R14.1 R15.1 R24.1 R25.2 R26.1 R27.1 R30.1 RX7.1 S2.2 S2.7 S2.8 S2.10 S2.12 S2.PAD S3.6 S3.7 S3.PAD S4.G1 S4.G2 U2.10 U2.11 U2.12 U2.14 U2.15 U2.16 U2.17 U2.19 U2.20 U2.24 U2.25 U2.30 U2.39 U2.40 U3.3 U3.7 U3.PAD U4.1 U4.10 U4.11 U4.20 U4.PAD U5.4 U6.2 U6.5 U6.6 U6.18 U6.25 VR1.3 VR1.9 VR1.13 VR3.2 VR3.PAD XA1.P13 XA1.P37 XJ1.A1/B12 XJ1.B1/A12 XJ1.S1 XJ1.S2 XJ1.S3 XJ1.S4 XR16.2 XR17.2 XR19.1 Y1.1 Y1.2
LED_SUP: D1.A1 D1.A2 D2.A1 D2.A2 JP1.1
N$1: XJ1.B5 XR17.1
N$2: D4.ANODE LS1.- Q2.D
N$13: XJ1.A5 XR16.1
N$28: R6.1 R7.2
N$42: JP6.2 U6.17
N$47: JP2.1 XR19.2
N$49: RX7.2 U3.4
N$64: R18.2 R23.1
N$66: R8.2 R9.1
N$69: R13.2 RT1.1
N$70: R13.1 R14.2
QI_TS_CTRL: C30.1 RT1.2 U4.13 XA1.P44
RF1 [UWB_RF]: A1.FEED S2.9
RF2 [UWB_RF]: A2.FEED S2.3
RF3 [UWB_RF]: A3.FEED S2.1 S4.IN S4.OUT
RFC [UWB_RF]: C4.P$2 S2.11
RFSW_V1: CX2.1 S2.4 XA1.P8
RFSW_V2: CX1.1 S2.5 XA1.P9
TC_OSC_38P4MHZ: C11.1 R10.2 R11.1 U2.21
TCXO_BIAS_SUPP: R11.2 RX2.1 RX3.1 RZ4.1
TCXO_OUT: C11.2 Y1.3
TCXO_REG_EN: RX1.2 RZ3.2 VR3.3
TCXO_REG_OUT: C52.2 RZ5.1 VR3.1
VBAT: C42.1 J4.3 J4.3SUPP JP9.1 S1.2 U3.10
VBAT_SWITCHED: C45.2 C48.1 JP8.1 R31.2 R33.1 R34.1 S1.3 VR1.1 VR1.7
VDD_TCXO: C26.1 RX3.2 RX4.2 RZ5.2 Y1.4
VQI: C29.1 C41.1 C53.1 Q1.A2 Q1.A3 Q1.B3 U3.1 U4.4
VR1_1P8_EN: R34.2 VR1.6
VR1_2P5_EN: R33.2 VR1.12
VR1_FB1: C8.P$1 R27.2 R29.2 VR1.4
VR1_FB2: C7.P$2 R26.2 R28.1 VR1.10
VR1_LX1: L2.P$2 VR1.8
VR1_LX2: L1.P$1 VR1.2
VUSB: C40.2 Q1.B2 Q1.C2 Q1.C3 U4.9 XJ1.A4/B9 XJ1.B4/A9